# Altium PCB REMO_4OUT_Double.PcbDoc
Units mm, origin at the board's own origin, x right, y up, seen from the top; angles counter-clockwise.
Board outline 49.53 x 36.2 mm, 2 copper layers (Top Layer, Bottom Layer); 37 components, 39 nets, 127 pads, 17 vias.
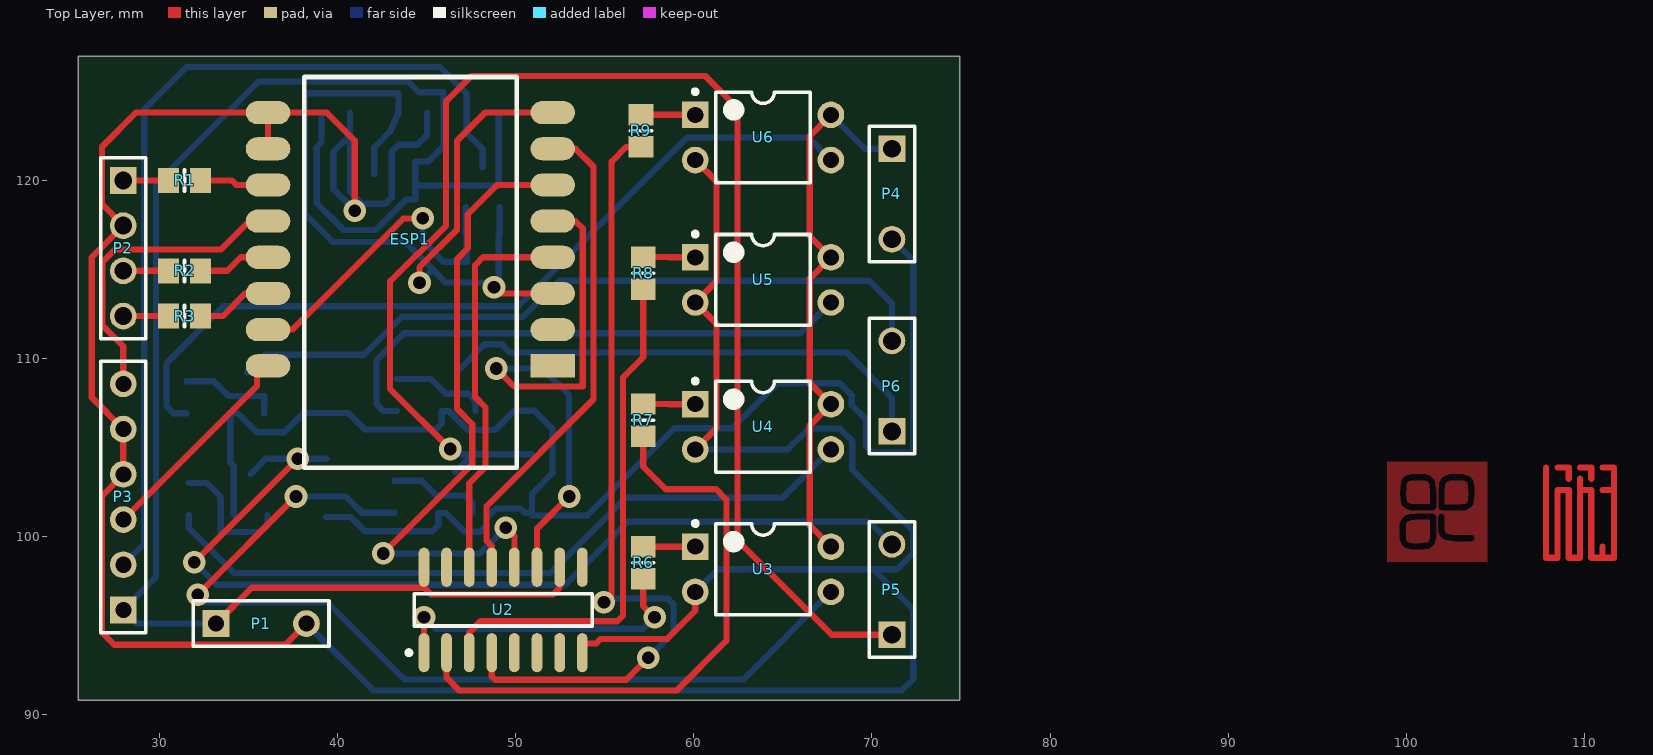
[diagram p0: Top Layer view]
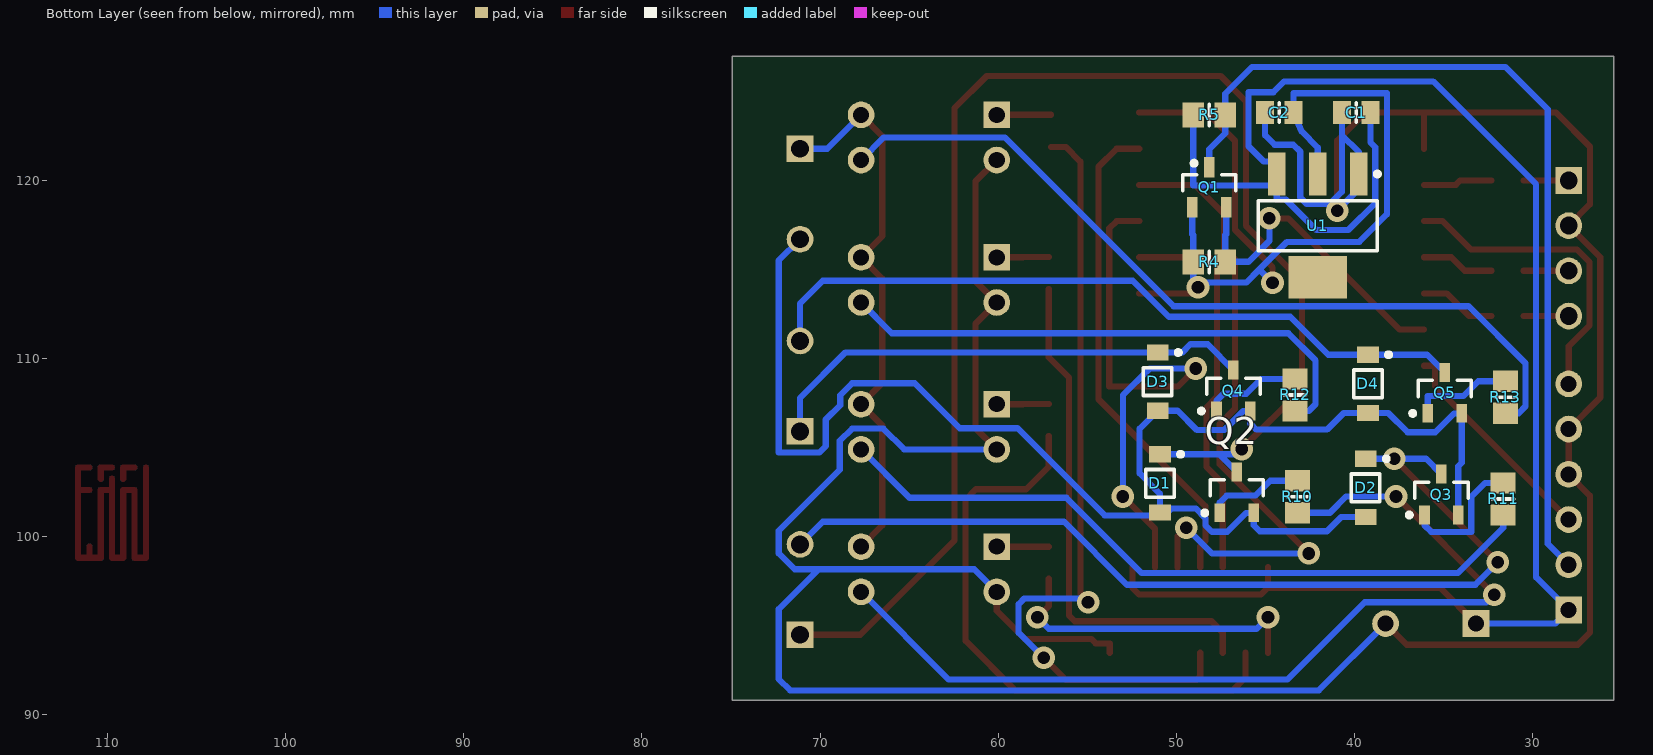
[diagram p1: Bottom Layer view, seen from below]

## Layer stack, top to bottom
Top Solder: solder mask 0.0102, Solder Resist, Dk 3.5
Top Layer: signal copper 0.0356
Dielectric 1: dielectric 0.32, FR-4, Dk 4.8
Bottom Layer: signal copper 0.0356
Bottom Solder: solder mask 0.0102, Solder Resist, Dk 3.5

## Board outline
25.4,90.805 25.4,127 74.93,127 74.93,90.805

## Design rules (kind name [scope] priority, off if disabled: settings)
Clearance [All] p1: gap=0.25 ignorepadtopadclearanceinfootprint=FALSE
PolygonConnect [All] p1: connectstyle=Relief reliefconductorwidth=0.254 reliefentries=4 polygonreliefangle="90 Angle" airgapwidth=0.254
RoutingVias [All] p1: holewidth=0.711 width=1.27 viastyle="Through Hole" minholewidth=0.711 minwidth=1.27 maxholewidth=0.711 maxwidth=1.27
SolderMaskExpansion [All] p1: expansion=0.102
Width [All] p1: maxlimit=1.4 minlimit=0.35 preferedwidth=0.35 minimp=50.000000 maximp=50.000000 favimp=50.000000
30 further rules are at their usual default settings.

## Components (designator, comment, footprint, x,y, rotation, side; value= is the part's Value field where it differs from the comment)
C1 "Cap2" 6-0805_L 39.878,123.825 r0 bottom value=10uF
C2 "Cap2" 6-0805_L 44.196,123.825 r0 bottom value=10uF
D1 "MMSD4148T3G" ONSC-SOD-123-2-425-04_V 50.904,102.997 r270 bottom
D2 "MMSD4148T3G" ONSC-SOD-123-2-425-04_V 39.347,102.743 r270 bottom
D3 "MMSD4148T3G" ONSC-SOD-123-2-425-04_V 51.031,108.712 r270 bottom
D4 "MMSD4148T3G" ONSC-SOD-123-2-425-04_V 39.22,108.585 r270 bottom
ESP1 "ESP-07" ESP-07 45.593,115.951 r180 top
P1 "5VDC" HDR1X3#1 33.147,95.123 r0 top
P2 "LED" HDR1X4 27.94,120.015 r270 top
P3 "Downloader" HDR1X6 27.94,95.885 r90 top
P4 "VDD" HDR1X3#2 71.12,121.793 r270 top
P5 "OUT12" HDR1X3#2 71.12,94.488 r90 top
P6 "OUT34" HDR1X3#2 71.12,105.918 r90 top
Q1 "MOSFET-N" SOT23_N 48.133,119.634 r90 bottom
Q2 "MMBT2222A" INF-SOT23_N 46.588,102.489 r90 bottom
Q3 "MMBT2222A" INF-SOT23_N 35.092,102.369 r90 bottom
Q4 "MMBT2222A" INF-SOT23_N 46.776,108.211 r90 bottom
Q5 "MMBT2222A" INF-SOT23_N 34.904,108.077 r90 bottom
R1 "Res1" 6-0805_N 31.38,120.015 r0 top value=1K
R2 "Res1" 6-0805_N 31.38,114.935 r0 top value=1K
R3 "Res1" 6-0805_N 31.38,112.395 r0 top value=1K
R4 "220" 6-0805_N 48.133,115.443 r180 bottom
R5 "220" 6-0805_N 48.133,123.698 r180 bottom
R6 "220" 6-0805_N 57.15,98.541 r90 top
R7 "220" 6-0805_N 57.15,106.553 r90 top
R8 "220" 6-0805_N 57.15,114.808 r90 top
R9 "220" 6-0805_N 57.023,122.798 r90 top
R10 "100" 6-0805_N 43.18,102.246 r90 bottom
R11 "100" 6-0805_N 31.623,102.119 r90 bottom
R12 "100" 6-0805_N 43.307,107.961 r90 bottom
R13 "100" 6-0805_N 31.496,107.834 r90 bottom
U1 "LM1117MPX-3.3/NOPB" MP04A_N 42.037,117.475 r270 bottom
U2 "MC74HC595AD" 751B-05_N 49.276,95.885 r90 top
U3 "PC817" DIP-4 63.881,98.171 r0 top
U4 "PC817" DIP-4 63.881,106.172 r0 top
U5 "PC817" DIP-4 63.881,114.427 r0 top
U6 "PC817" DIP-4 63.881,122.428 r0 top

## Footprints (in the part's own frame and the unit in brackets; to place one, negate y for a bottom-side part, rotate by r counter-clockwise, add the part's x,y. Pads: shape width x height; smd on the part's side, far side on the other; paste and mask are expansions set on the pad)
6-0805_L [mm] "Chip Resistor, Body 2.0x1.2mm, IPC High Density"
  rect 1x1.3 smd: 1(-0.8,0) 2(0.8,0)
  silkscreen extent 0,-0.55 0,0.55, body extent -1.07,-0.7 1.07,0.7, height 0.7
6-0805_N [mm] "Chip Resistor, Body 2.0x1.2mm, IPC Medium Density"
  rect 1.2x1.4 smd: 1(-0.9,0) 2(0.9,0)
  silkscreen extent 0,-0.6 0,0.6, body extent -1.07,-0.7 1.07,0.7, height 0.7
751B-05_N [mm] "SOIC, 16-Leads, Body 9.9x3.9mm, Pitch 1.27mm, IPC Medium Density"
  oval 2.2x0.6 smd: 1(-2.4,4.445) 2(-2.4,3.175) 3(-2.4,1.905) 4(-2.4,0.635) 5(-2.4,-0.635) 6(-2.4,-1.905) 7(-2.4,-3.175) 8(-2.4,-4.445) 9(2.4,-4.445) 10(2.4,-3.175) 11(2.4,-1.905) 12(2.4,-0.635) 13(2.4,0.635) 14(2.4,1.905) 15(2.4,3.175) 16(2.4,4.445)
  silkscreen extent -2.52,-5 0.9,5.42, body extent -2,-5 2,5, height 1.75
DIP-4 [mm] "DIP; 4 Leads; Row Spacing 7.62 mm; Pitch 2.54 mm"
  rect 1.5x1.5 hole 0.9: 1(-3.81,1.27)
  round 1.5 hole 0.9: 2(-3.81,-1.27) 3(3.81,-1.27) 4(3.81,1.27)
  silkscreen extent -3.93,-2.55 2.65,2.69, body extent -3.15,-2.5 3.15,2.5, height 5.6
ESP-07 [mm]
  rect 2.5x1.3 smd: 1(-6.477,6.35)
  oval 2.5x1.3 smd: 2(-6.477,4.318) 3(-6.477,2.286) 4(-6.477,0.254) 5(-6.477,-1.778) 6(-6.477,-3.81) 7(-6.477,-5.842) 8(-6.477,-7.874) 9(9.523,-7.874) 10(9.523,-5.842) 11(9.523,-3.81) 12(9.523,-1.778) 13(9.523,0.254) 14(9.523,2.286) 15(9.523,4.318) 16(9.523,6.35)
  silkscreen extent -4.45,-9.87 7.49,12.07
HDR1X3#1 [mm] "Connector; Header; 3 Position"
  rect 1.5x1.5 hole 0.9: 1(0,0)
  round 0 all layers, no hole: 2(2.54,0)
  round 1.5 hole 0.9: 3(5.08,0)
  silkscreen extent -1.27,-1.27 6.35,1.27
HDR1X3#2 [mm] "Connector; Header; 3 Position"
  rect 1.5x1.5 hole 1: 1(0,0)
  round 0 all layers, no hole: 2(2.54,0)
  round 1.5 hole 1: 3(5.08,0)
  silkscreen extent -1.27,-1.27 6.35,1.27
HDR1X4 [mm] "Connector; Header; 4 Position"
  rect 1.5x1.5 hole 1: 1(0,0)
  round 1.5 hole 1: 2(2.54,0) 3(5.08,0) 4(7.62,0)
  silkscreen extent -1.27,-1.27 8.89,1.27
HDR1X6 [mm] "Connector; Header; 6 Position"
  rect 1.5x1.5 hole 0.9: 1(0,0)
  round 1.5 hole 0.9: 2(2.54,0) 3(5.08,0) 4(7.62,0) 5(10.16,0) 6(12.7,0)
  silkscreen extent -1.27,-1.27 13.97,1.27
INF-SOT23_N [mm] "SOT23, 3-Leads, Body 2.9x1.3 mm, Pitch 0.95 mm, IPC Medium Density"
  rect 1.05x0.6 smd: 1(-1.15,0.95) 2(-1.15,-0.95) 3(1.15,0)
  silkscreen extent -1.27,-1.5 0.7,1.93, body extent -0.7,-1.5 0.7,1.5, height 1.1
MP04A_N [mm] "SOT223, 4-Leads, Body 6.5x3.5mm, Pitch 2.3mm, Lead Span 7mm, IPC Medium Density"
  rect 2.4x1 smd: 1(-2.9,2.3) 2(-2.9,0) 3(-2.9,-2.3)
  rect 2.4x3.3 smd: 4(2.9,0)
  silkscreen extent -3.02,-3.35 1.4,3.47, body extent -1.86,-3.35 1.86,3.35, height 1.8
ONSC-SOD-123-2-425-04_V [mm] "SOD, 2-Leads, Body 2.69x1.6mm"
  rect 0.91x1.22 smd: 1(-1.635,0) 2(1.635,0)
  silkscreen extent -1.76,-0.8 0.78,1.28, body extent -1.35,-0.8 1.35,0.8, height 1.35
SOT23_N [mm] "SOT23, 3-Leads, Body 2.9x1.3mm, Pitch 0.95mm, Lead Span 2.3mm - Reverse Pinning, IPC Medium Density"
  rect 1.15x0.6 smd: 1(1.125,0) 2(-1.125,-0.95) 3(-1.125,0.95)
  silkscreen extent -0.2,-1.5 1.47,1.5, body extent -0.7,-1.5 0.7,1.5, height 1.1

## Part data
C1 C2: "Capacitor", PackageReference=CAPR5-4X5, Published=23-Sep-2002, Publisher="Altium Limited"
D1 D2 D3 D4: "Switching Diode, 2-Pin SOD-123, Pb-Free, Tape and Reel", Manufacturer="On Semiconductor", Supplier Part Number 1=MMSD4148T3GOSTR-ND, ComponentLink1Description="Manufacturer URL", ComponentLink1URL=http://www.onsemi.com/, ComponentLink2Description=Datasheet, ComponentLink2URL=http://www.onsemi.com/pub_link/Collateral/MMSD4148T1-D.PDF, ComponentLink3Description="Package Specification", ComponentLink3URL=http://www.onsemi.com/pub_link/Collateral/425-04.PDF, Configuration=Single, DatasheetVersion="Rev. 11", IF Max (A)=0.2, Mounting Technology="Surface Mount", PackageDescription="2-Pin SOD, Body 1.6 x 2.69 mm", PackageReference=SOD-123-2-425-04, PackageVersion="Rev. G, 10/2009", Packing="Tape and Reel", PartNumber=MMSD4148T3G, RoHS=TRUE, Supplier 1=Digi-Key, Supplier 2=Digi-Key, Supplier 3=Digi-Key, Supplier 4=Farnell, Supplier 5=Newark, Supplier 6=Newark, Supplier 7=Mouser, Supplier Part Number 2=MMSD4148T3GOSCT-ND, Supplier Part Number 3=MMSD4148T3GOSDKR-ND, Supplier Part Number 4=2368409, Supplier Part Number 5=10N9495, Supplier Part Number 6=02M9801, Supplier Part Number 7=863-MMSD4148T3G, trr Max (ns)=4
P1 P4 P5 P6: library part "Header 3", "Header, 3-Pin", LatestRevisionDate=17-Jul-2002, LatestRevisionNote="Re-released for DXP Platform.", Publisher="Altium Limited"
P2: library part "Header 4", "Header, 4-Pin", LatestRevisionDate=17-Jul-2002, LatestRevisionNote="Re-released for DXP Platform.", Publisher="Altium Limited"
P3: library part "Header 6", "Header, 6-Pin", LatestRevisionDate=17-Jul-2002, LatestRevisionNote="Re-released for DXP Platform.", Publisher="Altium Limited"
Q1: "N-Channel MOSFET", PackageDocument=1995/1996, LatestRevisionDate=17-Jul-2002, LatestRevisionNote="Re-released for DXP Platform.", PackageReference=E3, Published=8-Jun-2000, Publisher="Altium Limited"
Q2 Q3 Q4 Q5: "NPN Silicon Switching Transistor, 40 V VCEO, 600 mA IC, SOT23, Reel, Green", Manufacturer=Infineon, ComponentLink1Description="Manufacturer URL", ComponentLink1URL=http://www.infineon.com/, ComponentLink2Description=Datasheet, ComponentLink2URL=http://www.infineon.com/dgdl/smbt2222a_mmbt2222a.pdf?folderId=db3a30431441fb5d011445fab851018e&fileId=db3a30431441fb5d011445fbaff0018f, ComponentLink3Description="Package Specification", ComponentLink3URL=http://www.infineon.com/dgdl/SOT23-Package_Overview.pdf?folderId=db3a30431936bc4b0119532290053c66&fileId=db3a30431936bc4b0119533468123c85, Green=TRUE, IC="150 mA", IC (max)="600 mA", ICBO (max)="10 nA", Mounting Technology="Surface Mount", PackageDescription="3-Pin Small Outline Transistor Package, 1.3 x 2.9 mm Body, 0.95 mm Pitch", PackageReference=SOT23, PackageVersion=Apr-08, Packing=Reel, PartNumber=MMBT2222A, Polarity=NPN, VCBO (max)="75 V", VCE="10 V", VCE (max)="10 V", VCEO (max)="40 V", VEBO (max)="6 V"
R1 R2 R3: "Resistor", LatestRevisionDate=17-Jul-2002, LatestRevisionNote="Re-released for DXP Platform.", PackageDescription="Axial Device, Thru-Hole; 2 Leads; 0.3 in Pin Spacing", PackageReference=AXIAL-0.3, Published=8-Jun-2000, Publisher="Altium Limited"
R4 R5 R6 R7 R8 R9 R10 R11 R12 R13: library part RES0805, "RES0805"
U1: "800mA Low-Dropout Linear Regulator, 4-pin SOT-223, Pb-Free", Manufacturer="National Semiconductor", PackageTopMarking=XYTT*N05A, PowerWise=N, Code_IPC=SOT223-4, Code_JEDEC=TO-261-AA, ComponentLink1Description="Manufacturer URL", ComponentLink1URL=http://www.national.com/, ComponentLink2Description="LM1117 Datasheet", ComponentLink2URL=http://www.national.com/ds/LM/LM1117.pdf, ComponentLink3Description="LM1117 Web Page", ComponentLink3URL=http://www.national.com/pf/LM/LM1117.html, ComponentLink4Description="MP04A Package Page", ComponentLink4URL=http://www.national.com/packaging/folders/mp04a.html, CompType="LDO IC", DatasheetVersion=Apr-2006, High-Reliability=Y, PackageDescription="Molded SOT-223, 6.50 x 3.56 x 1.6mm Body, 4 Lead, 2.3mm Pitch", PackageReference=MP04A, PackageVersion="revB, Apr-2003", PartNumber=LM1117MPX-3.3/NOPB, PinCount=4, RoHS=Y
U2: "8-Bit Serial-Input/Serial or Prallel-Output Shift Register with Latched 3-State Outputs", Code_IPC=SOIC127P600-16, Code_JEDEC=MS-012-AC, ComponentLink1Description="Manufacturer Link", ComponentLink1URL=http://www.onsemi.com/, ComponentLink2Description=Datasheet, ComponentLink2URL=http://www.onsemi.com/pub/Collateral/MC74HC595A-D.PDF, DatasheetVersion=Mar-2000, LatestRevisionDate=13-Apr-2006, LatestRevisionNote="IPC-7351 Footprint Added.", PackageDescription="16-Pin Small Outline Integrated Circuit 1.27 mm Pitch", PackageReference=751B-05, PackageVersion=Oct-1999, Published=15-Apr-2002, Publisher="Altium Limited"
U3 U4 U5 U6: library part Optoisolator1, "4-Pin Phototransistor Optocoupler", DatasheetVersion=Nov-2003, LatestRevisionDate=04-Mar-2005, LatestRevisionNote="Sch pins 3 & 4 Swapped.", PackageReference=DIP-4, Published=24-Mar-1999, Publisher="Altium Limited"

## Via types
v1: diameter 1.27, hole 0.711, Top Layer to Bottom Layer, 17 vias

## Nets (pads, with @x,y where several pads share a name; then routed paths per layer and width w, separated by ;. In a path a pad name is that pad's centre, name@x,y a point inside that pad or via, vN(x,y) a via of type N, cw(c..) or ccw(c..) an arc to the next point about the centre after c; other vN are vias at no path point)
3.3V: C2.1 ESP1.3 ESP1.8 Q1.3 R4.1 U1.2 | length 53.5
  Top Layer w0.35: v1(44.577,114.275) 44.577,115.128 46.685,117.236 46.685,122.25 48.26,123.825 ESP1.8 ; v1(48.768,114.021) 49.124,113.665 ESP1.3
  Bottom Layer w0.35: U1.2 42.037,121.861 42.947,122.771 C2.1 43.396,124.917 38.151,124.917 38.151,118.11 39.7,116.561 43.764,116.561 45.314,115.011 ; v1(44.577,114.275) 45.314,115.011 ; v1(48.768,114.021) v1@49.033,114.286 ; Q1.3 49.083,116.992 49.033,116.942 R4.1 v1@49.033,114.286 ; 45.314,115.011 46.05,114.275 48.767,114.285 v1@49.033,114.286
BLED: ESP1.14 R3.2 | length 4.3
  Top Layer w0.35: R3.2 33.528,112.395 34.798,113.665 ESP1.14
COM: D1.2 D2.2 D3.2 D4.2 P4.3 Q2.2 Q3.2 Q4.2 Q5.2 | length 86.5
  Bottom Layer w0.35: Q3.2 34.142,103.962 33.954,104.15 Q5.2 34.373,106.927 35.433,105.867 36.992,105.867 38.075,106.95 D4.2 40.589,106.95 41.52,106.02 45.483,106.02 45.826,106.362 Q4.2 46.228,107.061 47.295,105.994 48.828,105.994 49.911,107.077 D3.2 52.045,106.063 52.045,103.556 50.904,102.415 D1.2 ; D2.2 40.716,101.108 41.52,100.305 45.295,100.305 45.638,100.647 Q2.2 46.057,101.339 47.117,100.279 47.981,100.279 48.349,100.647 48.349,101.043 48.895,101.589 50.242,101.589 50.469,101.362 D1.2 ; P4.3 72.314,115.519 72.314,104.724 70.04,104.724 69.672,105.093 69.672,106.584 68.866,107.391 68.866,107.95 68.199,108.617 64.673,108.617 62.152,106.096 58.903,106.096 54,101.194 50.904,101.194 D1.2
DS: ESP1.4 U2.14 | length 22.1
  Top Layer w0.35: U2.14 47.371,102.997 48.285,103.911 48.285,107.264 47.701,107.848 47.701,115.252 48.146,115.697 ESP1.4
GLED: ESP1.13 R2.2 | length 4.1
  Top Layer w0.35: R2.2 33.782,114.935 34.544,115.697 ESP1.13
GND: C1.2 C2.2 ESP1.9 ESP1.10 P1.3 P2.2 P3.4 P3.5 U1.1 U2.8 U3.2 U4.2 U5.2 U6.2 | length 182.6
  Top Layer w0.35: ESP1.10 ESP1.9 ; P1.3 37.033,93.929 27.432,93.929 26.746,94.615 26.746,102.311 P3.4 P3.5 26.165,107.82 26.165,115.7 P2.2 26.746,118.669 26.746,121.92 28.651,123.825 ESP1.9 ; v1(40.945,118.313) 40.945,122.25 39.37,123.825 ESP1.9 ; U2.8 53.721,94.005 54.508,94.005 54.762,94.259 58.496,94.259 60.071,95.834 U3.2 ; U4.2 61.265,106.096 61.265,111.963 U5.2 61.265,114.351 61.265,119.964 U6.2
  Bottom Layer w0.35: P1.3 41.986,91.364 71.679,91.364 72.314,91.999 72.314,95.936 70.079,98.171 ; C1.2 40.678,122.556 ; v1(40.945,118.313) 40.945,118.325 39.737,119.532 U1.1 39.737,121.615 40.678,122.556 ; C2.2 44.996,122.555 44.463,122.022 43.409,122.022 43.026,121.639 43.026,119.062 42.67,118.707 41.351,118.707 40.678,119.38 40.678,122.556 ; U3.2 61.341,98.171 70.079,98.171 ; U4.2 65.278,104.902 66.453,106.077 68.192,106.077 68.885,105.385 68.885,103.759 72.314,100.33 72.314,99.06 71.425,98.171 70.079,98.171
GPIO0: ESP1.12 P3.6 | length 17.6
  Top Layer w0.35: P3.6 27.94,110.693 26.765,111.868 26.765,115.422 27.472,116.129 33.426,116.129 35.027,117.729 ESP1.12
NetP2_1: P2.1 R1.1 | length 2.5
  Top Layer w0.35: P2.1 R1.1
NetP2_3: P2.3 R2.1 | length 2.5
  Top Layer w0.35: P2.3 R2.1
NetP2_4: P2.4 R3.1 | length 2.5
  Top Layer w0.35: P2.4 R3.1
NetQ2_1: Q2.1 R10.2 | length 5.4
  Bottom Layer w0.35: R10.2 44.704,103.146 45.539,102.311 47.144,102.311 47.538,101.917 Q2.1
NetQ3_1: Q3.1 R11.2 | length 7.4
  Bottom Layer w0.35: R11.2 32.633,103.019 33.417,102.235 33.417,100.269 35.664,100.269 36.042,100.647 Q3.1
NetQ4_1: Q4.1 R12.2 | length 5.5
  Bottom Layer w0.35: R12.2 45.215,108.861 46.05,108.026 47.332,108.026 47.726,107.632 Q4.1
NetQ5_1: Q5.1 R13.2 | length 5.7
  Bottom Layer w0.35: R13.2 33.02,108.734 33.855,107.899 35.854,107.899 Q5.1
NetR6_1: R6.1 U2.1 | length 17.9
  Top Layer w0.35: U2.1 v1(44.831,95.479) ; R6.1 57.15,96.103 v1(57.785,95.468)
  Bottom Layer w0.35: v1(44.831,95.479) 45.477,94.833 57.15,94.833 v1(57.785,95.468)
NetR6_2: R6.2 U3.1 | length 2.9
  Top Layer w0.35: R6.2 U3.1
NetR7_1: R7.1 U2.2 | length 33.7
  Top Layer w0.35: U2.2 46.101,92.075 46.816,91.36 59.026,91.36 61.824,94.158 61.824,102.083 61.239,102.667 58.42,102.667 57.15,103.937 R7.1
NetR7_2: R7.2 U4.1 | length 2.9
  Top Layer w0.35: R7.2 58.598,107.453 58.609,107.442 U4.1
NetR8_1: R8.1 U2.3 | length 29
  Top Layer w0.35: U2.3 47.371,94.615 48.006,95.25 55.689,95.25 56.007,95.567 56.007,108.941 57.15,110.084 R8.1
NetR8_2: R8.2 U5.1 | length 2.9
  Top Layer w0.35: R8.2 58.598,115.708 58.609,115.697 U5.1
NetR9_1: R9.1 U2.4 | length 45.4
  Top Layer w0.35: U2.4 48.641,92.151 48.832,91.96 56.197,91.96 v1(57.429,93.193) ; v1(54.94,96.317) 55.372,96.749 55.372,121.073 56.197,121.898 R9.1
  Bottom Layer w0.35: v1(54.94,96.317) 55.151,96.528 58.52,96.528 58.845,96.203 58.845,94.608 v1(57.429,93.193)
NetR9_2: R9.2 U6.1 | length 3
  Top Layer w0.35: R9.2 U6.1
NetR10_1: R10.1 U3.3 | length 53.3
  Top Layer w0.35: v1(32.131,96.749) v1(37.643,102.26)
  Bottom Layer w0.35: v1(32.131,96.749) 32.563,96.317 39.395,96.317 43.739,91.973 62.763,91.973 U3.3 ; v1(37.643,102.26) 40.437,102.26 41.351,101.346 R10.1
NetR11_1: R11.1 U4.3 | length 40.7
  Bottom Layer w0.35: R11.1 31.623,100.499 34.154,97.968 51.943,97.968 56.159,102.184 64.973,102.184 U4.3
NetR12_1: R12.1 U5.3 | length 30.6
  Bottom Layer w0.35: R12.1 42.545,107.061 42.164,107.442 42.164,109.906 43.688,111.43 65.964,111.43 U5.3
NetR13_1: R13.1 U6.3 | length 46.8
  Bottom Layer w0.35: R13.1 30.752,106.934 30.371,107.315 30.371,109.759 33.562,112.95 50.136,112.95 59.614,122.428 66.421,122.428 U6.3
OE: ESP1.7 U2.13 | length 27.8
  Top Layer w0.35: U2.13 48.641,99.468 48.349,99.761 48.349,101.714 54.356,107.721 54.356,120.777 53.34,121.793 ESP1.7
OUT1: D1.1 P5.1 Q2.3 | length 81.2
  Top Layer w0.35: v1(46.304,104.927) 42.917,108.315 42.917,114.316 46.076,117.475 46.076,124.46 47.498,125.882 60.63,125.882 62.446,124.066 62.446,99.784 67.742,94.488 P5.1
  Bottom Layer w0.35: v1(46.304,104.927) 46.6,104.632 47.581,104.632 ; Q2.3 47.581,104.632 ; D1.1 47.581,104.632
OUT2: D2.1 P5.3 Q3.3 | length 54.5
  Top Layer w0.35: v1(31.928,98.558) v1(37.748,104.378)
  Bottom Layer w0.35: v1(31.928,98.558) 33.178,97.307 52.756,97.307 56.286,100.838 69.85,100.838 P5.3 ; Q3.3 35.951,104.378 v1(37.748,104.378) D2.1
OUT3: D3.1 P6.1 Q4.3 | length 28.1
  Bottom Layer w0.35: Q4.3 48.222,110.807 49.189,110.807 49.649,110.347 D3.1 68.571,110.347 71.12,107.798 P6.1
OUT4: D4.1 P6.3 Q5.3 | length 41
  Bottom Layer w0.35: Q5.3 35.897,110.22 D4.1 41.449,110.22 43.579,112.35 50.399,112.35 52.426,114.376 69.85,114.376 71.12,113.106 P6.3
RLED: ESP1.11 R1.2 | length 3.9
  Top Layer w0.35: R1.2 34.036,120.015 34.29,119.761 ESP1.11
RX: P3.2 Q1.1 R5.2 | length 50.3
  Bottom Layer w0.35: P3.2 29.115,99.6 29.115,124.009 31.496,126.39 45.72,126.39 47.233,124.877 R5.2 47.233,122.668 48.133,121.768 Q1.1
RXD: ESP1.15 Q1.2 R4.2 | length 18.6
  Top Layer w0.35: ESP1.15 37.44,111.633 43.689,117.881 v1(44.755,117.881)
  Bottom Layer w0.35: v1(44.755,117.881) 44.755,116.611 45.923,115.443 R4.2 47.233,116.942 47.183,116.992 Q1.2
SHCP: ESP1.5 U2.11 | length 31.1
  Top Layer w0.35: v1(48.895,109.449) 49.911,108.433 53.746,108.433 53.746,117.323 53.34,117.729 ESP1.5 ; U2.11 51.181,100.457 v1(52.984,102.26)
  Bottom Layer w0.35: v1(48.895,109.449) 51.486,109.449 52.984,107.95 v1(52.984,102.26)
STCP: ESP1.6 U2.12 | length 37.1
  Top Layer w0.35: v1(42.545,99.06) 47.549,104.064 47.549,106.324 46.685,107.188 46.685,115.599 47.295,116.209 47.295,118.11 48.946,119.761 ESP1.6 ; v1(49.428,100.508) 49.911,100.025 U2.12
  Bottom Layer w0.35: v1(42.545,99.06) 47.981,99.06 v1(49.428,100.508)
TXD: ESP1.16 P3.3 | length 12.4
  Top Layer w0.35: P3.3 35.458,108.483 35.458,109.601 ESP1.16
VCC: C1.1 P1.1 P3.1 R5.1 U1.3 U2.10 U2.16 | length 99.6
  Top Layer w0.35: P1.1 35.163,97.139 44.831,97.139 44.831,97.155 ; U2.16 44.831,97.155 ; U2.10 52.451,97.13 52.07,96.749 45.237,96.749 44.831,97.155
  Bottom Layer w0.35: P1.1 28.702,95.123 P3.1 29.771,97.716 29.771,119.789 35.56,125.578 43.917,125.578 44.526,124.968 45.923,124.968 45.923,121.92 45.085,121.082 44.337,121.082 U1.3 U1.3@44.337,119.736 ; C1.1 39.078,122.149 38.811,121.882 38.811,118.745 40.326,117.23 42.111,117.23 43.822,118.941 44.337,118.941 U1.3@44.337,119.736 ; R5.1 49.033,119.736 U1.3@44.337,119.736
VDD: P4.1 U3.4 U4.4 U5.4 U6.4 | length 31.4
  Top Layer w0.35: U3.4 66.497,100.635 66.497,106.248 U4.4 66.497,108.636 66.497,114.503 U5.4 66.497,116.891 66.497,122.504 U6.4
  Bottom Layer w0.35: U6.4 69.596,121.793 P4.1
pads on no net: ESP1.1 ESP1.2 P1.2 P4.2 P5.2 P6.2 U1.4 U2.5 U2.6 U2.7 U2.9 U2.15
copper on no net: | length 34.9
  Top Layer w0.35: 107.869,103.892 107.869,98.812 108.504,98.812 108.504,102.622 109.139,102.622 109.139,98.812 109.774,98.812 109.774,103.257 ; 108.504,103.892 109.139,103.892 109.139,103.257 ; 109.774,102.622 110.409,102.622 110.409,98.812 111.679,98.812 111.679,102.622 111.044,102.622 ; 109.774,103.892 110.409,103.892 110.409,103.257 ; 111.044,98.812 111.044,99.447 ; 111.044,103.892 111.679,103.892 111.679,101.987

## Polygon pours and split planes (outlines as drawn)
no net on Top Layer "Bottom Layer-No Net" (solid, pour order 0): 98.946,104.206 104.559,104.206 104.559,98.568 104.534,98.593 98.946,98.593

## Silkscreen, mask and mechanical layers (free items; w line width, h text height)
Mechanical 1:
  the board outline again, w0.254